# EAGLE board eagle (EAGLE 7.5.0)
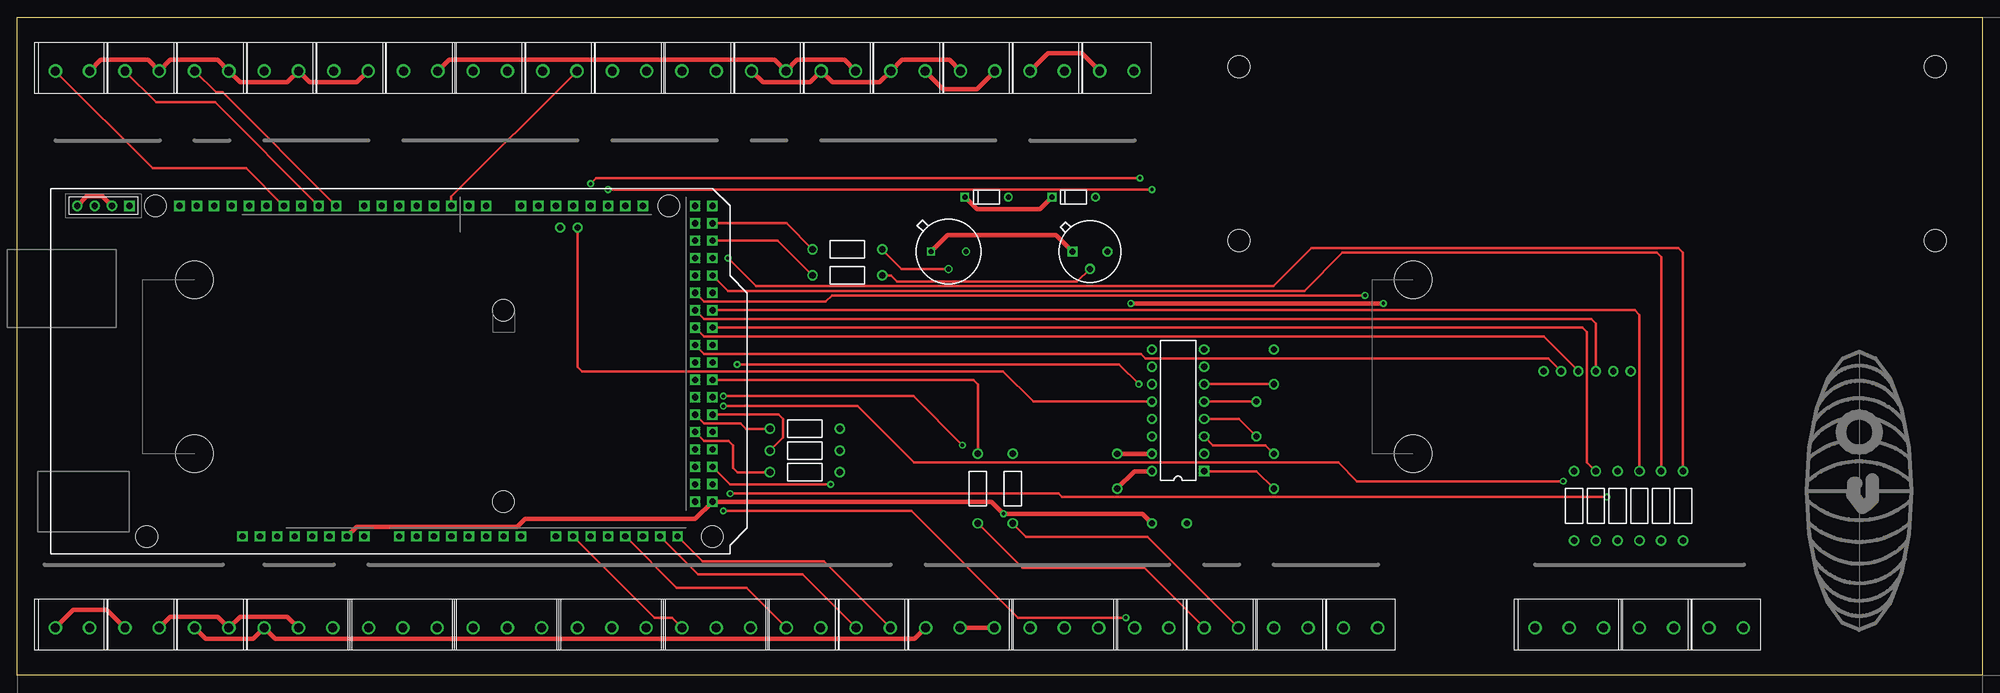
[diagram p0: board, top side]
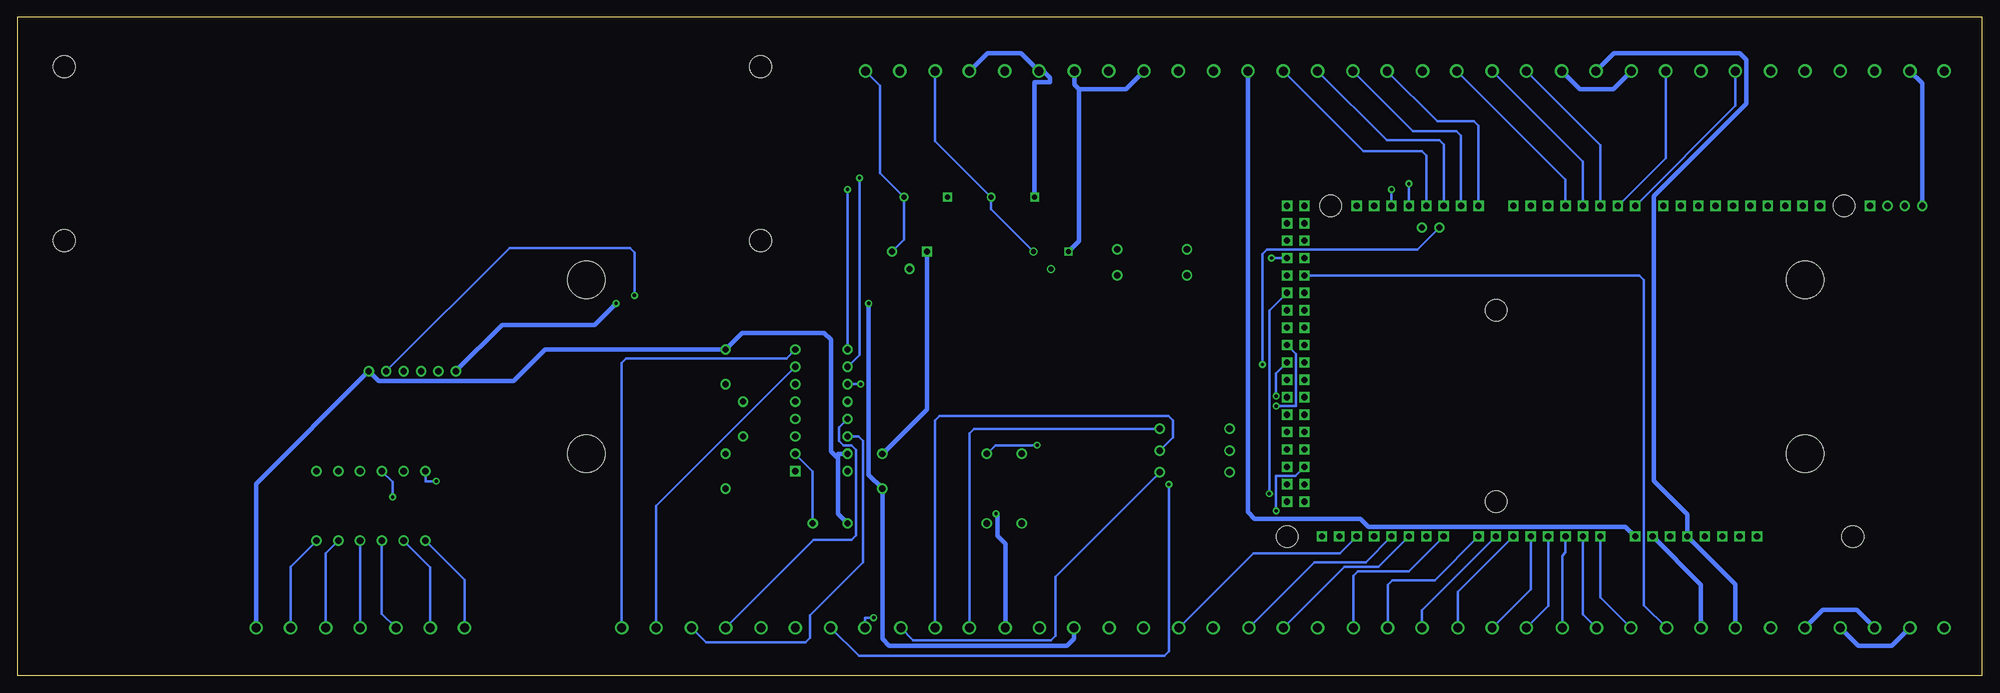
[diagram p1: board, bottom side, seen from below]

Size 286.76 x 96.11 mm. Coordinates in mm from the lower left corner, seen from the top.
Outline: 0,96.11 286.76,96.11 286.76,0 0,0 0,96.11
Copper layers (1*16): Top 0.035mm / dielectric 1.5mm / Bottom 0.035mm
Design rules "default *": minimum track width 10mil, minimum drill 0.61mm, track to track 8mil, track to pad 8mil, pad to pad 8mil, via to via 8mil, smd to smd 8mil, copper to edge 40mil, drill to drill 8mil, minimum pad ring 0mil, minimum via ring 8mil, stop-mask expansion 4mil, vias tented up to drill 19mil, thermal gap 10mil
Net classes: 0 Default: width 0.33 mm, clearance 0.33 mm, clearance 0.33 mm to class 1, clearance 0.33 mm to class 2; 1 Voltage: width 0.66 mm, clearance 0.33 mm, clearance 0.33 mm to class 0, clearance 0.33 mm to class 2; 2 Default KiCad: width 0.2 mm, clearance 0.2 mm, clearance 0.2 mm to class 0, clearance 0.2 mm to class 1
Holes 5.5 mm at 25.89,57.77 25.89,32.37 203.69,57.77 203.69,32.37
Holes 3.2 mm at 279.89,63.48 279.89,88.88 178.29,88.88 178.29,63.48

## Footprints (pad centres in the part's own frame; a part is rotated, then mirrored left to right if it is on the bottom)
691502710003 = drill 1.3 pad 1.95: 1 -5,0; 2 0,0; 3 5,0
691502710002 = drill 1.3 pad 1.95: 1 -2.5,0; 2 2.5,0
ARDUINO_MEGA_2560 = drill 0.9 pad 1.5 square: 3.3V -15.24,-24.13; 5V -12.7,-24.13; 5V_1 43.18,24.13; 5V_2 45.72,24.13; A0 0,-24.13; A1 2.54,-24.13; A2 5.08,-24.13; A3 7.62,-24.13; A4 10.16,-24.13; A5 12.7,-24.13; A6 15.24,-24.13; A7 17.78,-24.13; A8 22.86,-24.13; A9 25.4,-24.13; A10 27.94,-24.13; A11 30.48,-24.13; A12 33.02,-24.13; A13 35.56,-24.13; A14 38.1,-24.13; A15 40.64,-24.13; AREF -27,24.13; D0 12.7,24.13; D1 10.16,24.13; D2 7.62,24.13; D3 5.08,24.13; D4 2.54,24.13; D5 0,24.13; D6 -2.54,24.13; D7 -5.08,24.13; D8 -9.195,24.13; D9 -11.735,24.13; D10 -14.275,24.13; D11 -16.815,24.13; D12 -19.355,24.13; D13 -21.895,24.13; D14 17.78,24.13; D15 20.32,24.13; D16 22.86,24.13; D17 25.4,24.13; D18 27.94,24.13; D19 30.48,24.13; D20 33.02,24.13; D21 35.56,24.13; D22 43.18,21.59; D23 45.72,21.59; D24 43.18,19.05; D25 45.72,19.05; D26 43.18,16.51; D27 45.72,16.51; D28 43.18,13.97; D29 45.72,13.97; D30 43.18,11.43; D31 45.72,11.43; D32 43.18,8.89; D33 45.72,8.89; D34 43.18,6.35; D35 45.72,6.35; D36 43.18,3.81; D37 45.72,3.81; D38 43.18,1.27; D39 45.72,1.27; D40 43.18,-1.27; D41 45.72,-1.27; D42 43.18,-3.81; D43 45.72,-3.81; D44 43.18,-6.35; D45 45.72,-6.35; D46 43.18,-8.89; D47 45.72,-8.89; D48 43.18,-11.43; D49 45.72,-11.43; D50 43.18,-13.97; D51 45.72,-13.97; D52 43.18,-16.51; D53 45.72,-16.51; DA -29.515,24.13; GND -7.62,-24.13; GND_1 45.72,-19.05; GND_2 43.18,-19.05; GND_3 -10.16,-24.13; GND_4 -24.435,24.13; IOREF -20.32,-24.13; N.C. -22.86,-24.13; RESET -17.78,-24.13; SCL -32.055,24.13; VIN -5.08,-24.13 | hole 3.175: -36.83,-24.13; -35.56,24.13; 15.24,-19.05; 15.24,8.89; 45.72,-24.13; 39.37,24.13
DO-25 = drill 0.711 pad 1.27 square: 1 -3.175,0 | drill 0.711 pad 1.27: 2 3.175,0
Pad = drill 0.9 pad 1.5: 1 0,0
RES-10.16/5.1x2.5_R2 = drill 0.965 pad 1.524: 1 -5.08,0; 2 5.08,0
RES-10.16/5.1x2.5 = drill 0.965 pad 1.524: 1 -5.08,0; 2 5.08,0
DIP-16 = drill 0.9 pad 1.5 square: 1 -3.81,8.89 | drill 0.9 pad 1.5: 2 -3.81,6.35; 3 -3.81,3.81; 4 -3.81,1.27; 5 -3.81,-1.27; 6 -3.81,-3.81; 7 -3.81,-6.35; 8 -3.81,-8.89; 9 3.81,-8.89; 10 3.81,-6.35; 11 3.81,-3.81; 12 3.81,-1.27; 13 3.81,1.27; 14 3.81,3.81; 15 3.81,6.35; 16 3.81,8.89
TO-5 = drill 0.711 pad 1.168 square: 1 -2.54,1.27 | drill 0.711 pad 1.168: 2 0,-1.27; 3 2.54,1.27
TO-39 = drill 0.9 pad 1.5 square: 1 -2.54,1.27 | drill 0.9 pad 1.5: 2 0,-1.27; 3 2.54,1.27
P97 = drill 0.9 pad 1.5 square: 1 0,0 | drill 0.9 pad 1.5: 2 0,-2.54; 3 0,-5.08; 4 0,-7.62

## Placement (x,y rotation side)
0-2  691502710003  [691502710003]  56.29,6.97 0 top
1+2  691502710002  [691502710002]  69.03,88.25 0 top
1-3  691502710003  [691502710003]  226.47,6.97 0 top
3+4  691502710002  [691502710002]  79.19,88.25 0 top
3-5  691502710003  [691502710003]  71.53,6.97 0 top
4+5  691502710002  [691502710002]  239.21,6.97 0 top
5V+/-  691502710002  [691502710002]  8.07,6.97 0 top
5V+/-(1)  691502710002  [691502710002]  18.23,6.97 0 top
5V+/-(2)  691502710002  [691502710002]  28.39,6.97 0 top
5V+/-/-  691502710003  [691502710003]  137.57,6.97 0 top
6+GND  691502710002  [691502710002]  249.37,6.97 0 top
6-8  691502710003  [691502710003]  86.77,6.97 0 top
9-11  691502710003  [691502710003]  102.01,6.97 0 top
12-13  691502710002  [691502710002]  114.75,6.97 0 top
12V+/-  691502710002  [691502710002]  119.83,88.25 0 top
12V+/-(1)  691502710002  [691502710002]  129.99,88.25 0 top
12V+/-(2)  691502710002  [691502710002]  140.15,88.25 0 top
14-15  691502710002  [691502710002]  124.91,6.97 0 top
ARD1  ARDUINO MEGA 2560  [ARDUINO_MEGA_2560]  55.74,44.43 0 top
but/sound  691502710002  [691502710002]  165.55,6.97 0 top
D1  DO-25  [DO-25]  141.46,69.83 0 top
D2  DO-25  [DO-25]  154.16,69.83 0 top
exit_but  691502710002  [691502710002]  18.23,88.25 0 top
ger_on  691502710002  [691502710002]  38.55,88.25 0 top
ger_open  691502710002  [691502710002]  48.71,88.25 0 top
input  691502710002  [691502710002]  109.67,88.25 0 top
inside_sound  691502710002  [691502710002]  28.39,88.25 0 top
L+/L-  691502710002  [691502710002]  150.31,88.25 0 top
light_but  691502710002  [691502710002]  8.07,88.25 0 top
none  691502710002  [691502710002]  175.71,6.97 0 top
Pad1  PAD  [Pad]  183.37,27.29 0 top
Pad2  PAD  [Pad]  183.37,32.37 0 top
Pad3  PAD  [Pad]  180.83,39.99 0 top
Pad4  PAD  [Pad]  180.83,34.91 0 top
Pad5  PAD  [Pad]  183.37,42.53 0 top
Pad6  PAD  [Pad]  183.37,47.61 0 top
Pad7  PAD  [Pad]  160.51,27.29 0 top
Pad8  PAD  [Pad]  160.51,32.37 0 top
Pad9  PAD  [Pad]  165.59,22.21 0 top
Pad10  PAD  [Pad]  170.67,22.21 0 top
Pad11  PAD  [Pad]  79.23,65.39 0 top
Pad12  PAD  [Pad]  81.77,65.39 0 top
Pad14  PAD  [Pad]  235.44,44.43 180 top
Pad15  PAD  [Pad]  222.74,44.43 180 bottom
Pad16  PAD  [Pad]  232.9,44.43 180 top
Pad17  PAD  [Pad]  230.36,44.43 180 top
Pad18  PAD  [Pad]  227.82,44.43 180 top
Pad19  PAD  [Pad]  225.28,44.43 180 top
power  691502710002  [691502710002]  58.87,88.25 0 top
R1  RES-10.16/5.1X2.5  [RES-10.16/5.1x2.5_R2]  227.19,24.75 270 top
R2  RES-10.16/5.1X2.5  [RES-10.16/5.1x2.5_R2]  230.36,24.75 270 top
R3  RES-10.16/5.1X2.5  [RES-10.16/5.1x2.5_R2]  233.54,24.75 270 top
R4  RES-10.16/5.1X2.5  [RES-10.16/5.1x2.5_R2]  236.71,24.75 270 top
R5  RES-10.16/5.1X2.5  [RES-10.16/5.1x2.5_R2]  239.89,24.75 270 top
R6  RES-10.16/5.1X2.5  [RES-10.16/5.1x2.5_R2]  243.06,24.75 270 top
R7  RES-10.16/5.1X2.5  [RES-10.16/5.1x2.5]  121.14,58.4 180 top
R8  RES-10.16/5.1X2.5  [RES-10.16/5.1x2.5]  121.14,62.21 0 top
R9  RES-10.16/5.1X2.5  [RES-10.16/5.1x2.5]  114.94,36.01 180 top
R10  RES-10.16/5.1X2.5  [RES-10.16/5.1x2.5]  114.94,32.83 180 top
R11  RES-10.16/5.1X2.5  [RES-10.16/5.1x2.5]  114.94,29.66 180 top
R12  RES-10.16/5.1X2.5  [RES-10.16/5.1x2.5_R2]  140.19,27.29 270 top
R13  RES-10.16/5.1X2.5  [RES-10.16/5.1x2.5_R2]  145.27,27.29 270 top
R+/R-  691502710002  [691502710002]  160.47,88.25 0 top
R/G/B  691502710003  [691502710003]  152.81,6.97 0 top
TX1/RX1(S)  691502710002  [691502710002]  185.87,6.97 0 top
TX2/RX2  691502710002  [691502710002]  99.51,88.25 0 top
TX2/RX2(S)  691502710002  [691502710002]  196.03,6.97 0 top
TX3/RX3  691502710002  [691502710002]  89.35,88.25 0 top
U1  DIP-16  [DIP-16]  169.4,38.72 180 top
U2  TO-5  [TO-5]  135.91,60.62 0 top
U5  TO-39  [TO-39]  156.54,60.62 0 top
warn(+/-/pin)  691502710003  [691502710003]  41.05,6.97 0 top
XP3  CONN_01X04  [P97]  16.39,68.56 270 top

## Library data of the parts
0-2 1+2 1-3 3+4 3-5 4+5 5V+/- 5V+/-(1) 5V+/-(2) 5V+/-/- 6+GND 6-8 9-11 12-13 12V+/- 12V+/-(1) 12V+/-(2) 14-15 but/sound D1 D2 exit_but ger_on ger_open input inside_sound L+/L- light_but none Pad1-Pad12 Pad14-Pad19 power R1-R13 R+/R- R/G/B TX1/RX1(S) TX2/RX2 TX2/RX2(S) TX3/RX3 U1 U2 warn(+/-/pin) XP3 = common
ARD1 = common; DATASHEET: https://www.flickr.com/photos/johngineer/5484250200/sizes/o/in/photostream/
U5 = common; POSSIBLE NAMES: TO-205AD, SOT5

## Nets
5V [Voltage]: 5V+/-(1).1 5V+/-(2).1 5V+/-.1 5V+/-/-.1 ARD1.5V Pad7.1 Pad15.1 power.1 U1.16 warn(+/-/pin).1
12V [Voltage]: 12V+/-(1).1 12V+/-(2).1 12V+/-.1 ARD1.VIN D1.1 D2.1 input.1 L+/L-.1 R+/R-.1
button_exit: ARD1.D8 inside_sound.1
gerkon_on: ARD1.D7 ger_on.1
gerkon_open: ARD1.D6 ger_open.1
GND [Voltage]: 5V+/-(1).2 5V+/-(2).2 5V+/-.2 5V+/-/-.2 5V+/-/-.3 6+GND.2 12V+/-(1).2 12V+/-(2).2 12V+/-.2 ARD1.GND ARD1.GND_1 exit_but.2 ger_on.2 ger_open.2 input.2 inside_sound.2 light_but.2 Pad6.1 Pad8.1 Pad9.1 Pad14.1 power.2 U1.15 U2.1 U5.1 warn(+/-/pin).2 XP3.2 XP3.4
Locker_-: D1.2 L+/L-.2 U2.3
Net_0: ARD1.D9 exit_but.1
Net_1: ARD1.D27 R6.1
Net_2: R9.1 R/G/B.1
Net_3: R10.1 R/G/B.2
Net_4: R7.1 U5.2
Net_5: ARD1.D25 R7.2
Net_6: D2.2 R+/R-.2 U5.3
Net_7: 1-3.2 R2.2
Net_8: ARD1.D23 R8.1
Net_9: 1-3.1 R1.2
Net_10: 1+2.1 ARD1.D5
Net_11: 1+2.2 ARD1.D4
Net_12: 3+4.1 ARD1.D3
Net_13: 3+4.2 ARD1.D2
Net_14: 14-15.2 ARD1.A15
Net_15: 14-15.1 ARD1.A14
Net_16: ARD1.D14 TX3/RX3.1
Net_17: ARD1.D15 TX3/RX3.2
Net_18: Pad1.1 U1.1
Net_19: ARD1.D16 TX2/RX2.1
Net_20: ARD1.D17 TX2/RX2.2
Net_21: R11.1 R/G/B.3
Net_22: Pad2.1 U1.3
Net_23: Pad4.1 U1.4
Net_24: Pad3.1 U1.5
Net_25: Pad5.1 U1.6
Net_26: ARD1.D28 warn(+/-/pin).3
Net_27: ARD1.D41 R12.1
Net_28: ARD1.D50 but/sound.1
Net_29: ARD1.D45 R10.2
Net_30: ARD1.D51 but/sound.2
Net_31: Pad10.1 U1.2
Net_32: ARD1.D44 R9.2
Net_34: 4+5.1 R4.2
Net_35: R8.2 U2.2
Net_36: ARD1.D11 light_but.1
Net_37: ARD1.D46 R11.2
Net_39: ARD1.D29 R5.1
Net_43: 1-3.3 R3.2
Net_44: ARD1.D35 R2.1
Net_45: 4+5.2 R5.2
Net_47: ARD1.D31 R3.1
Net_48: ARD1.D33 R4.1
Net_49: ARD1.D37 R1.1
Net_51: 6+GND.1 R6.2
Net_53: 12-13.2 ARD1.A13
Net_54: 12-13.1 ARD1.A12
Net_55: 9-11.2 ARD1.A10
Net_56: 9-11.3 ARD1.A11
Net_57: 9-11.1 ARD1.A9
Net_58: 6-8.3 ARD1.A8
Net_59: 6-8.2 ARD1.A7
Net_60: 6-8.1 ARD1.A6
Net_61: 3-5.3 ARD1.A5
Net_62: 3-5.2 ARD1.A4
Net_63: 3-5.1 ARD1.A3
Net_64: 0-2.3 ARD1.A2
Net_65: 0-2.2 ARD1.A1
Net_66: 0-2.1 ARD1.A0
Net_68: TX1/RX1(S).2 U1.14
Net_69: TX1/RX1(S).1 U1.13
Net_70: TX2/RX2(S).2 U1.8
Net_71: TX2/RX2(S).1 U1.7
Net_72: Pad11.1 U1.11
Net_73: Pad12.1 U1.12
Net_74: ARD1.D18 U1.10
Net_75: ARD1.D19 U1.9
Net_77: none.1 R12.2
Net_78: none.2 R13.2
Net_79: ARD1.D39 R13.1
Net_80: ARD1.D30 Pad16.1
Net_81: ARD1.D32 Pad17.1
Net_82: ARD1.D34 Pad18.1
Net_83: ARD1.D36 Pad19.1

## Tracks (layer width: path | path; a pad name or v marks a point on that pad's centre or on a via)
5V  (via drill 0.49 pad 1.02)
  Top 0.66: 5V+/-(2).1 27.53,5.33 34.42,5.33 warn(+/-/pin).1 37.69,5.33 130.94,5.33 5V+/-/-.1 | Pad7.1 163.05,29.83 U1.16 | v199.35,54.32 v162.5,54.32 | 5V+/-(1).1 13.11,9.59 8.2,9.59 5V+/-.1
  Bottom 0.66: warn(+/-/pin).1 36.05,13.32 ARD1.5V 43.04,23.49 47.95,28.41 47.95,69.97 34.42,83.51 34.42,89.88 35.41,90.87 53.75,90.87 power.1 | 5V+/-/-.1 132.57,5.33 133.56,4.34 159.52,4.34 160.51,5.33 Pad7.1 162.5,29.27 v162.5,54.32 | v199.35,54.32 202.49,51.19 215.98,51.19 Pad15.1 | 5V+/-(1).1 18.36,9.59 23.27,9.59 5V+/-(2).1
12V
  Top 0.66: input.1 108.81,86.61 115.7,86.61 12V+/-.1 118.97,86.61 125.86,86.61 12V+/-(1).1 129.13,89.88 136.02,89.88 12V+/-(2).1 | D1.1 140.03,68.09 149.25,68.09 D2.1 | L+/L-.1 150.44,90.87 155.35,90.87 R+/R-.1
  Bottom 0.66: input.1 107.17,23.86 106.18,22.87 90.75,22.87 89.59,21.71 52.07,21.71 ARD1.VIN | L+/L-.1 145.19,90.87 140.28,90.87 12V+/-(2).1 136.99,88.25 136.02,87.27 136.02,86.61 138.29,86.61 D1.1
button_exit
  Top 0.33: ARD1.D8 29.98,85.13 29.01,85.13 inside_sound.1
gerkon_on
  Bottom 0.33: ger_on.1 36.05,83.17 ARD1.D7
gerkon_open
  Bottom 0.33: ger_open.1 46.21,75.55 ARD1.D6
GND  (via drill 0.49 pad 1.02)
  Top 0.66: Pad9.1 164.17,23.63 v143.92,23.63 142.16,25.38 ARD1.GND_1 98.94,22.87 74.12,22.87 72.97,21.71 49.53,21.71 ARD1.GND | power.2 63.01,89.88 110.54,89.88 input.2 113.81,89.88 120.7,89.88 12V+/-.2 | light_but.2 12.21,89.88 19.1,89.88 exit_but.2 22.37,89.88 29.26,89.88 inside_sound.2 32.53,86.61 39.42,86.61 ger_on.2 42.69,86.61 49.58,86.61 ger_open.2 | 5V+/-(1).2 22.37,8.6 29.26,8.6 5V+/-(2).2 32.53,8.6 39.42,8.6 warn(+/-/pin).2 | U5.1 151.6,64.3 135.77,64.3 U2.1 | 12V+/-(1).2 135.12,85.62 140.03,85.62 12V+/-(2).2 | U1.15 Pad8.1 | 5V+/-/-.3 5V+/-/-.2 | XP3.4 10.18,69.97 12.44,69.97 XP3.2
  Bottom 0.66: Pad9.1 167,23.62 167,31.71 | 167,31.71 167.99,32.7 167.99,49.02 168.98,50.01 180.97,50.01 Pad6.1 209.73,47.61 214.31,43.02 234.03,43.02 Pad14.1 251.87,28 6+GND.2 | U5.1 154,38.88 Pad8.1 | ARD1.GND 41.05,13.24 warn(+/-/pin).2 | 5V+/-/-.3 142.57,19.21 143.74,20.38 143.74,23.45 v143.92,23.63 | 5V+/-(1).2 18.11,4.34 13.2,4.34 5V+/-.2 | power.2 58.75,85.62 53.84,85.62 ger_open.2 | 12V+/-.2 124.96,85.62 131.83,85.62 | 131.83,85.62 132.49,86.28 12V+/-(1).2 | U1.15 167,32.37 167,31.71 | U2.1 131.83,63.43 131.83,85.62 | light_but.2 8.77,86.44 XP3.4
Locker_-
  Bottom 0.33: U2.3 144.64,68.09 D1.2 152.81,78.01 L+/L-.2
Net_0
  Top 0.33: ARD1.D9 28.9,83.67 20.31,83.67 exit_but.1
Net_1  (via drill 0.49 pad 1.02)
  Top 0.33: v103.71,60.94 107.82,56.83 183.28,56.83 188.87,62.42 242.4,62.42 243.06,61.76 R6.1
  Bottom 0.33: ARD1.D27 v103.71,60.94
Net_2
  Bottom 0.33: R/G/B.1 147.81,35.35 147.15,36.01 R9.1
Net_3
  Bottom 0.33: R/G/B.2 152.81,37.27 152.15,37.93 118.76,37.93 118.1,37.27 118.1,34.75 R10.1
Net_4
  Top 0.33: R7.1 127.48,58.4 128.39,57.49 154.68,57.49 U5.2
Net_5
  Top 0.33: ARD1.D25 110.98,63.48 R7.2
Net_6
  Bottom 0.33: U5.3 157.34,63.64 D2.2 160.84,73.34 160.84,86.12 R+/R-.2
Net_7
  Bottom 0.33: 1-3.2 226.47,15.78 R2.2
Net_8
  Top 0.33: ARD1.D23 112.25,66.02 R8.1
Net_9
  Bottom 0.33: 1-3.1 221.47,13.95 R1.2
Net_10
  Bottom 0.33: 1+2.1 55.74,77.45 ARD1.D5
Net_11
  Bottom 0.33: 1+2.2 58.28,74.99 ARD1.D4
Net_12
  Bottom 0.33: 3+4.1 60.82,72.37 ARD1.D3
Net_13
  Top 0.33: 3+4.2 63.36,69.91 ARD1.D2
Net_14
  Top 0.33: ARD1.A15 100.01,16.67 117.71,16.67 14-15.2
Net_15
  Top 0.33: 14-15.1 114.58,14.8 99.34,14.8 ARD1.A14
Net_16
  Bottom 0.33: ARD1.D14 73.52,80.29 74.18,80.95 79.55,80.95 TX3/RX3.1
Net_17
  Bottom 0.33: ARD1.D15 76.06,78.82 76.72,79.48 83.08,79.48 TX3/RX3.2
Net_18
  Top 0.33: Pad1.1 180.83,29.83 U1.1
Net_19
  Bottom 0.33: ARD1.D16 78.6,77.5 79.26,78.16 86.92,78.16 TX2/RX2.1
Net_20
  Bottom 0.33: ARD1.D17 81.14,75.92 81.8,76.58 90.35,76.58 TX2/RX2.2
Net_21
  Bottom 0.33: R/G/B.3 156.01,5.17 135.93,5.17 135.27,5.83 135.27,14.4 R11.1
Net_22
  Top 0.33: U1.3 174.51,33.61 182.13,33.61 Pad2.1
Net_23
  Top 0.33: U1.4 178.29,37.45 Pad4.1
Net_24
  Top 0.33: U1.5 Pad3.1
Net_25
  Top 0.33: U1.6 Pad5.1
Net_26
  Bottom 0.33: ARD1.D28 50.02,58.4 49.36,57.74 49.36,10.28 warn(+/-/pin).3
Net_27
  Top 0.33: ARD1.D41 139.53,43.16 140.19,42.5 R12.1
Net_28  (via drill 0.49 pad 1.02)
  Top 0.33: v161.77,8.44 146.07,8.44 130.48,24.03 v103.05,24.03
  Bottom 0.33: v103.05,24.03 103.05,29.17 100.21,29.17 ARD1.D50 | v161.77,8.44 163.05,8.44 but/sound.1
Net_29
  Top 0.33: ARD1.D45 111.11,38.08 111.77,37.42 111.77,34.75 R10.2
Net_30  (via drill 0.49 pad 1.02)
  Top 0.33: v118.72,27.9 104.02,27.9 ARD1.D51
  Bottom 0.33: v118.72,27.9 118.72,3.52 119.38,2.86 163.94,2.86 but/sound.2
Net_31
  Bottom 0.33: U1.2 170.67,29.83 Pad10.1
Net_32
  Top 0.33: ARD1.D44 100.21,36.79 105.58,36.79 106.36,36.01 R9.2
Net_34
  Bottom 0.33: R4.2 4+5.1
Net_35
  Top 0.33: R8.2 129.08,59.35 U2.2
Net_36
  Top 0.33: ARD1.D11 33.44,74.04 19.78,74.04 light_but.1
Net_37
  Top 0.33: ARD1.D46 100.21,34.25 103.82,34.25 104.48,33.59 104.48,30.32 105.14,29.66 R11.2
Net_39
  Top 0.33: R5.1 239.89,61.1 239.23,61.76 193.41,61.76 187.8,56.15 103.71,56.15 ARD1.D29
Net_43
  Bottom 0.33: 1-3.3 233.54,9.03 R3.2
Net_44
  Top 0.33: R2.1 229.07,31.12 229.07,50.12 228.41,50.78 ARD1.D35
Net_45
  Bottom 0.33: R5.2 241.71,17.84 4+5.2
Net_47  (via drill 0.49 pad 1.02)
  Top 0.33: v104.05,26.55 151.94,26.55 152.44,26.04 v231.96,26.04
  Bottom 0.33: v104.05,26.55 104.05,53.27 ARD1.D31 | v231.96,26.04 231.96,28.25 R3.1
Net_48
  Top 0.33: R4.1 236.71,52.66 236.05,53.32 ARD1.D33
Net_49  (via drill 0.49 pad 1.02)
  Top 0.33: v103.05,39.33 122.63,39.33 130.89,31.07 192.8,31.07 195.5,28.37 v225.59,28.37
  Bottom 0.33: v103.05,39.33 100.16,39.33 100.16,46.95 ARD1.D37 | v225.59,28.37 227.19,28.37 R1.1
Net_51
  Bottom 0.33: R6.2 246.87,15.86 6+GND.1
Net_53
  Bottom 0.33: 12-13.2 106.38,17.84 93.76,17.84 ARD1.A13
Net_54
  Top 0.33: ARD1.A12 96.24,12.82 106.4,12.82 12-13.1
Net_55
  Bottom 0.33: ARD1.A10 88.09,15.89 93.09,15.89 9-11.2
Net_56
  Bottom 0.33: ARD1.A11 89.97,16.55 97.43,16.55 9-11.3
Net_57
  Top 0.33: ARD1.A9 93,8.44 95.54,8.44 9-11.1
Net_58
  Bottom 0.33: ARD1.A8 83.67,15.23 91.11,15.23 91.77,14.57 6-8.3
Net_59
  Bottom 0.33: ARD1.A7 79.91,13.91 86.11,13.91 86.77,13.25 6-8.2
Net_60
  Bottom 0.33: ARD1.A6 81.77,9.51 6-8.1
Net_61
  Bottom 0.33: ARD1.A5 76.53,12.21 3-5.3
Net_62
  Bottom 0.33: ARD1.A4 65.9,12.6 3-5.2
Net_63
  Bottom 0.33: ARD1.A3 63.36,10.14 3-5.1
Net_64
  Bottom 0.33: ARD1.A2 60.82,17.97 61.29,17.5 0-2.3
Net_65
  Bottom 0.33: ARD1.A1 58.28,8.95 0-2.2
Net_66
  Bottom 0.33: ARD1.A0 55.74,11.41 0-2.1
Net_68
  Bottom 0.33: TX1/RX1(S).2 186.24,4.84 171.74,4.84 171.08,5.5 171.08,8.78 163.32,16.54 163.32,34.25 163.98,34.91 U1.14
Net_69
  Bottom 0.33: TX1/RX1(S).1 170.54,19.8 165.01,19.8 164.35,20.45 164.35,32.95 165.01,33.61 166.18,33.61 166.84,34.27 166.84,36.2 U1.13
Net_70
  Bottom 0.33: TX2/RX2(S).2 198.53,45.65 197.87,46.31 174.51,46.31 U1.8
Net_71
  Bottom 0.33: TX2/RX2(S).1 193.53,24.75 U1.7
Net_72  (via drill 0.49 pad 1.02)
  Top 0.33: v163.66,42.53 160.78,45.41 v105.05,45.41
  Bottom 0.33: v105.05,45.41 105.05,61.53 104.39,62.19 82.43,62.19 Pad11.1 | U1.11 v163.66,42.53
Net_73
  Top 0.33: Pad12.1 81.77,45.07 82.43,44.41 143.87,44.41 148.29,39.99 U1.12
Net_74  (via drill 0.49 pad 1.02)
  Top 0.33: v83.68,71.79 84.52,72.62 v163.84,72.62
  Bottom 0.33: v163.84,72.62 163.84,46.82 U1.10 | ARD1.D18 v83.68,71.79
Net_75  (via drill 0.49 pad 1.02)
  Top 0.33: v165.59,70.96 v86.22,70.96
  Bottom 0.33: U1.9 v165.59,70.96 | ARD1.D19 v86.22,70.96
Net_77
  Top 0.33: none.1 164.47,15.71 146.69,15.71 R12.2
Net_78
  Top 0.33: none.2 164.94,20.24 147.24,20.24 R13.2
Net_79  (via drill 0.49 pad 1.02)
  Top 0.33: v137.93,33.62 130.77,40.78 v103.05,40.78
  Bottom 0.33: v103.05,40.78 103.05,44.11 ARD1.D39 | v137.93,33.62 144.02,33.62 R13.1
Net_80  (via drill 0.49 pad 1.02)
  Top 0.33: v196.69,55.49 118.87,55.49 117.95,54.57 100.21,54.57 ARD1.D30
  Bottom 0.33: v196.69,55.49 196.69,61.76 197.35,62.42 214.91,62.42 Pad16.1
Net_81
  Top 0.33: Pad17.1 230.36,51.37 229.7,52.03 100.21,52.03 ARD1.D32
Net_82
  Top 0.33: Pad18.1 222.77,49.49 100.21,49.49 ARD1.D34
Net_83
  Top 0.33: Pad19.1 223.4,46.31 164.64,46.31 164.01,46.95 100.21,46.95 ARD1.D36

## Text on the board
tDocu: pin | gnd | pin | gnd | pin | gnd | pin | gnd | pin | gnd | + | - | 1 | 2 | 3 | 4 | TX3 | RX3 | TX2 | RX2 | 12V+ | 12V- | + | - | + | - | + | - | + | - | + | - | buttons | sound | gerkons | sensors | TX/RX | input | 12V outputs | transistors | e | c | e | c | b | b | c4+ | c2+ | c5+ | c1+ | c3+ | warn | outside box | resist | 5V | A | TTL | security | + | - | + | - | + | - | + | - | pin | 0 | 1 | 2 | 3 | 4 | 5 | 6 | 7 | 8 | 9 | 10 | 11 | 12 | 13 | 14 | 15 | 5V+ | 5V- | 5V- | R | G | B | but | sound | pin | pin | TX1 | RX1 | TX2 | RX2 | 1 | 2 | 3 | 4 | 5 | 6 | GND